# Altium PCB Thermistor_Expansion_Board.PcbDoc
Units mil, origin at the board's own origin, x right, y up, seen from the top; angles counter-clockwise.
Board outline 6000 x 4000 mil, 2 copper layers (Top Layer, Bottom Layer); 60 components, 69 nets, 450 pads, 0 vias.
Unrouted connection lines stored in the file: 381.
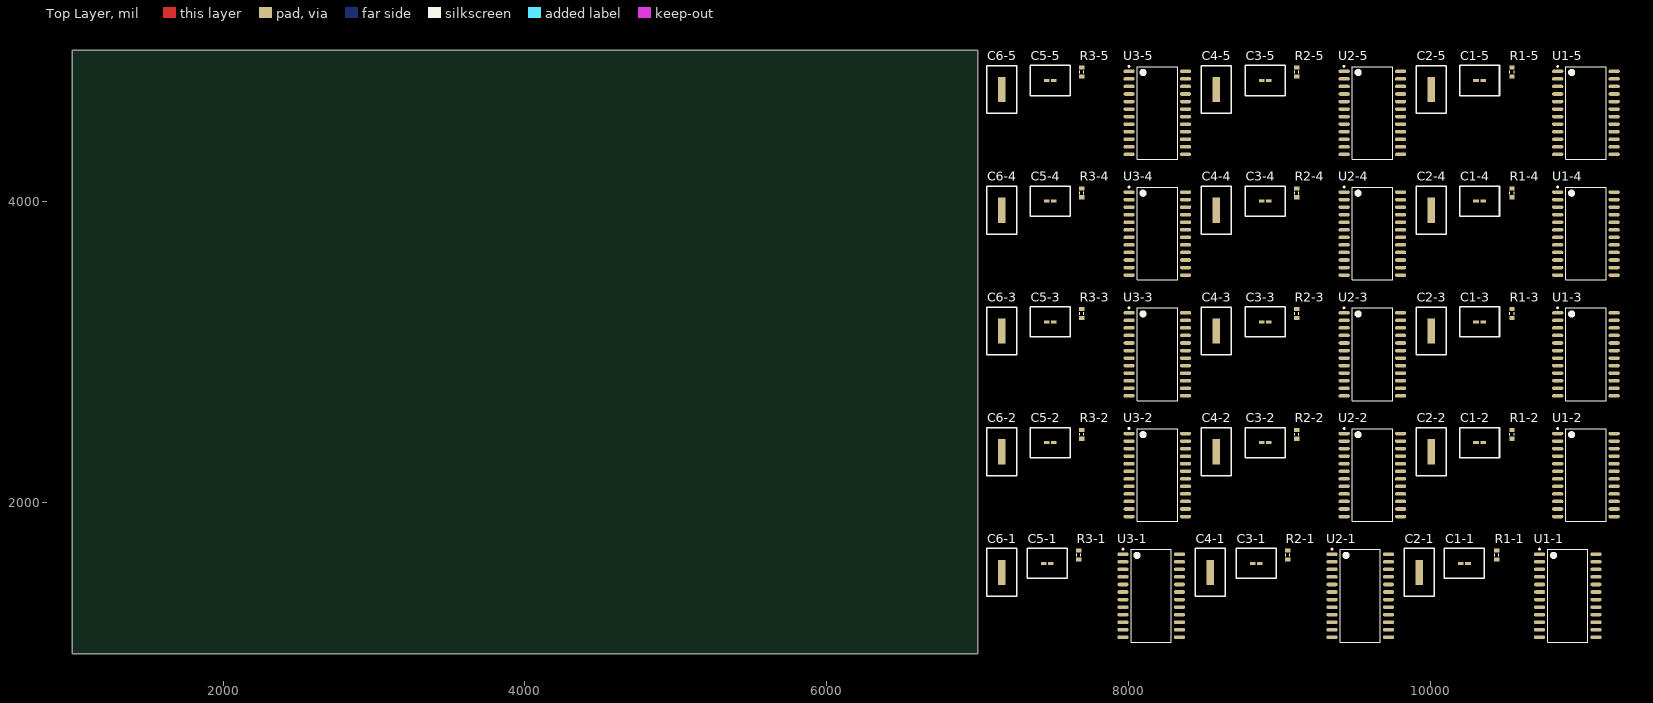
[diagram p0: Top Layer view]
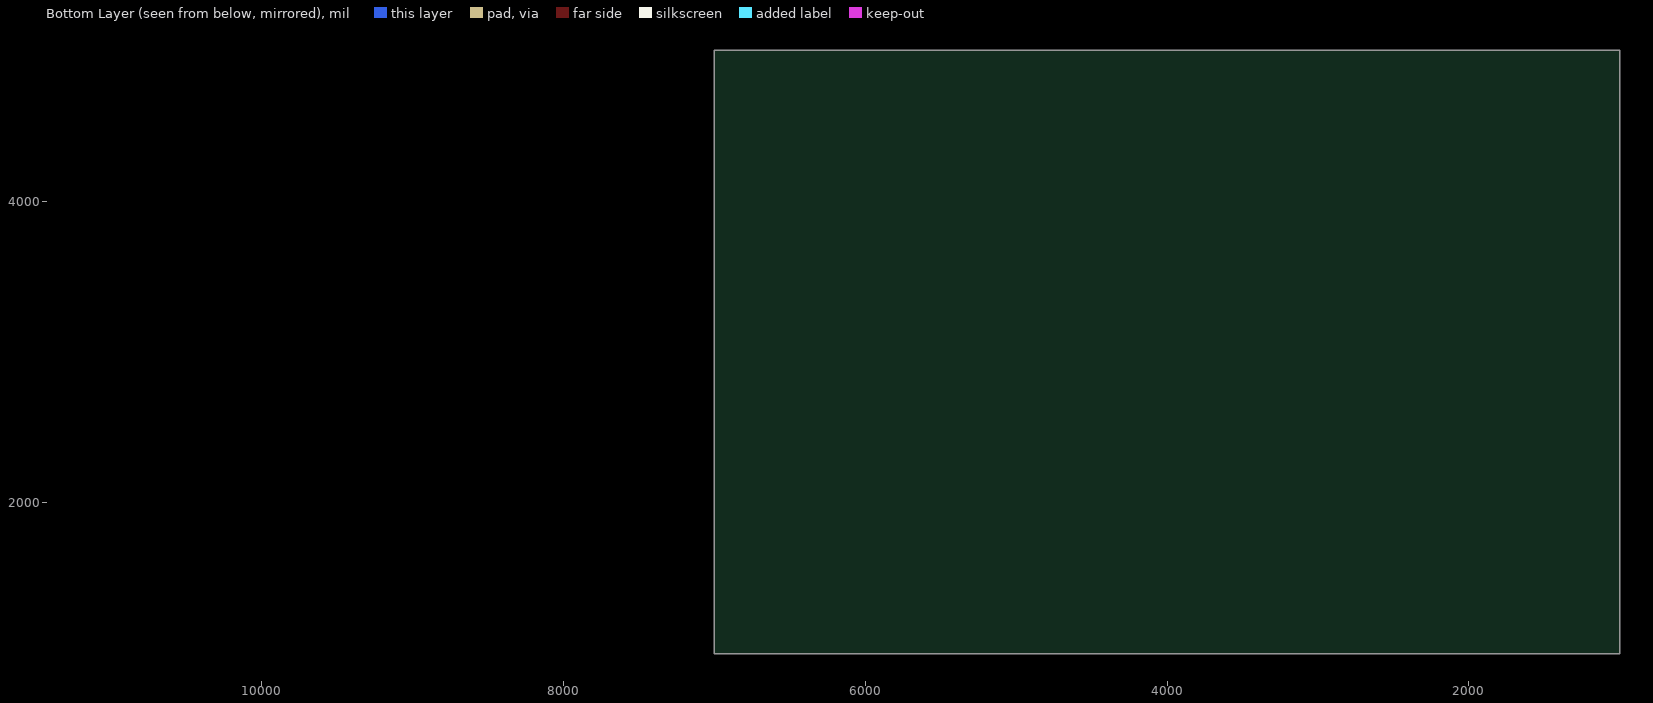
[diagram p1: Bottom Layer view, seen from below]

## Layer stack, top to bottom
Top Solder: solder mask 0.4, Solder Resist, Dk 3.5
Top Layer: signal copper 1.4
Dielectric 1: dielectric 12.6, FR-4, Dk 4.8
Bottom Layer: signal copper 1.4
Bottom Solder: solder mask 0.4, Solder Resist, Dk 3.5

## Board outline
1000,1000 7000,1000 7000,5000 1000,5000

## Design rules (kind name [scope] priority, off if disabled: settings)
Clearance [All] p1: gap=10 ignorepadtopadclearanceinfootprint=FALSE except(0: Arc-Hole Track-Hole SMDPad-Hole THPad-Hole Via-Hole Fill-Hole Poly-Hole Region-Hole Text-Hole)
PolygonConnect [All] p1: connectstyle=Relief reliefconductorwidth=10 reliefentries=4 polygonreliefangle="90 Angle" airgapwidth=10
RoomDefinition 50_Pin_Connector5 [InComponentClass('50_Pin_Connector5')] p1: confinementstyle=ConfineIn formatcopy=TRUE lockcomponents=FALSE outline 1135,2390 3135,2390 3135,3390 1135,3390
RoomDefinition 50_Pin_Connector4 [InComponentClass('50_Pin_Connector4')] p2: confinementstyle=ConfineIn formatcopy=TRUE lockcomponents=FALSE outline 1045,1085 3045,1085 3045,2085 1045,2085
RoomDefinition 50_Pin_Connector3 [InComponentClass('50_Pin_Connector3')] p3: confinementstyle=ConfineIn formatcopy=TRUE lockcomponents=FALSE outline 770,5550 2770,5550 2770,6550 770,6550
RoomDefinition 50_Pin_Connector1 [InComponentClass('50_Pin_Connector1')] p4: confinementstyle=ConfineIn formatcopy=TRUE lockcomponents=FALSE outline 2645,6685 4645,6685 4645,7685 2645,7685
RoomDefinition 3_MUX5 [InComponentClass('3_MUX5')] p5: confinementstyle=ConfineIn formatcopy=TRUE lockcomponents=FALSE outline 7045,4260 11270,4260 11270,5010 7045,5010
RoomDefinition 3_MUX4 [InComponentClass('3_MUX4')] p6: confinementstyle=ConfineIn formatcopy=TRUE lockcomponents=FALSE outline 7045,3460 11270,3460 11270,4210 7045,4210
RoomDefinition 3_MUX3 [InComponentClass('3_MUX3')] p7: confinementstyle=ConfineIn formatcopy=TRUE lockcomponents=FALSE outline 7045,2660 11270,2660 11270,3410 7045,3410
RoomDefinition 3_MUX2 [InComponentClass('3_MUX2')] p8: confinementstyle=ConfineIn formatcopy=TRUE lockcomponents=FALSE outline 7045,1860 11270,1860 11270,2610 7045,2610
RoomDefinition 3_MUX1 [InComponentClass('3_MUX1')] p9: confinementstyle=ConfineIn formatcopy=TRUE lockcomponents=FALSE outline 7045,1060 11150,1060 11150,1810 7045,1810
RoomDefinition 50_Pin_Connector2 [InComponentClass('50_Pin_Connector2')] p10: confinementstyle=ConfineIn formatcopy=TRUE lockcomponents=FALSE outline 980,3905 2980,3905 2980,4905 980,4905
RoutingVias [All] p1: holewidth=28 width=50 viastyle="Through Hole" minholewidth=28 minwidth=50 maxholewidth=28 maxwidth=50
SolderMaskExpansion [All] p1: expansion=4
Width [All] p1: maxlimit=10 minlimit=10 preferedwidth=10
30 further rules are at their usual default settings.

## Classes and differential pairs
channel class CD74HC4067_MUX: 3_MUX1 3_MUX2 3_MUX3 3_MUX4 3_MUX5
channel class AHK50H-ND_THERM_CONNECTOR: 50_Pin_Connector1 50_Pin_Connector2 50_Pin_Connector3 50_Pin_Connector4 50_Pin_Connector5
component class 50_Pin_Connector5: P2-5
component class 50_Pin_Connector4: P2-4
component class 50_Pin_Connector3: P2-3
component class 50_Pin_Connector2: P2-2
component class 50_Pin_Connector1: P2-1
component class 3_MUX5: C1-5 C2-5 C3-5 C4-5 C5-5 C6-5 R1-5 R2-5 R3-5 U1-5 U2-5 U3-5
component class 3_MUX4: C1-4 C2-4 C3-4 C4-4 C5-4 C6-4 R1-4 R2-4 R3-4 U1-4 U2-4 U3-4
component class 3_MUX3: C1-3 C2-3 C3-3 C4-3 C5-3 C6-3 R1-3 R2-3 R3-3 U1-3 U2-3 U3-3
component class 3_MUX2: C1-2 C2-2 C3-2 C4-2 C5-2 C6-2 R1-2 R2-2 R3-2 U1-2 U2-2 U3-2
component class 3_MUX1: C1-1 C2-1 C3-1 C4-1 C5-1 C6-1 R1-1 R2-1 R3-1 U1-1 U2-1 U3-1

## Components (designator, comment, footprint, x,y, rotation, side; value= is the part's Value field where it differs from the comment)
C1-1 "0.1uF Cap" "Capacitor - duplicate" 10225,1600 r0 top (schematic designator C1)
C1-2 "0.1uF Cap" "Capacitor - duplicate" 10325,2400 r0 top (schematic designator C1)
C1-3 "0.1uF Cap" "Capacitor - duplicate" 10325,3200 r0 top (schematic designator C1)
C1-4 "0.1uF Cap" "Capacitor - duplicate" 10325,4000 r0 top (schematic designator C1)
C1-5 "0.1uF Cap" "Capacitor - duplicate" 10325,4800 r0 top (schematic designator C1)
C2-1 "1uF Samsung Cap" Capacitor 9925,1540 r90 top (schematic designator C2)
C2-2 "1uF Samsung Cap" Capacitor 10005,2340 r90 top (schematic designator C2)
C2-3 "1uF Samsung Cap" Capacitor 10005,3140 r90 top (schematic designator C2)
C2-4 "1uF Samsung Cap" Capacitor 10005,3940 r90 top (schematic designator C2)
C2-5 "1uF Samsung Cap" Capacitor 10005,4740 r90 top (schematic designator C2)
C3-1 "0.1uF Cap" "Capacitor - duplicate" 8845,1600 r0 top (schematic designator C3)
C3-2 "0.1uF Cap" "Capacitor - duplicate" 8905,2400 r0 top (schematic designator C3)
C3-3 "0.1uF Cap" "Capacitor - duplicate" 8905,3200 r0 top (schematic designator C3)
C3-4 "0.1uF Cap" "Capacitor - duplicate" 8905,4000 r0 top (schematic designator C3)
C3-5 "0.1uF Cap" "Capacitor - duplicate" 8905,4800 r0 top (schematic designator C3)
C4-1 "1uF Samsung Cap" Capacitor 8540,1540 r90 top (schematic designator C4)
C4-2 "1uF Samsung Cap" Capacitor 8580,2340 r90 top (schematic designator C4)
C4-3 "1uF Samsung Cap" Capacitor 8580,3140 r90 top (schematic designator C4)
C4-4 "1uF Samsung Cap" Capacitor 8580,3940 r90 top (schematic designator C4)
C4-5 "1uF Samsung Cap" Capacitor 8580,4740 r90 top (schematic designator C4)
C5-1 "0.1uF Cap" "Capacitor - duplicate" 7460,1600 r0 top (schematic designator C5)
C5-2 "0.1uF Cap" "Capacitor - duplicate" 7480,2400 r0 top (schematic designator C5)
C5-3 "0.1uF Cap" "Capacitor - duplicate" 7480,3200 r0 top (schematic designator C5)
C5-4 "0.1uF Cap" "Capacitor - duplicate" 7480,4000 r0 top (schematic designator C5)
C5-5 "0.1uF Cap" "Capacitor - duplicate" 7480,4800 r0 top (schematic designator C5)
C6-1 "1uF Samsung Cap" Capacitor 7160,1540 r90 top (schematic designator C6)
C6-2 "1uF Samsung Cap" Capacitor 7160,2340 r90 top (schematic designator C6)
C6-3 "1uF Samsung Cap" Capacitor 7160,3140 r90 top (schematic designator C6)
C6-4 "1uF Samsung Cap" Capacitor 7160,3940 r90 top (schematic designator C6)
C6-5 "1uF Samsung Cap" Capacitor 7160,4740 r90 top (schematic designator C6)
R1-1 "Res3" J1-0603 10440,1655 r90 top value=3.3K (schematic designator R1)
R1-2 "Res3" J1-0603 10540,2455 r90 top value=3.3K (schematic designator R1)
R1-3 "Res3" J1-0603 10540,3255 r90 top value=3.3K (schematic designator R1)
R1-4 "Res3" J1-0603 10540,4055 r90 top value=3.3K (schematic designator R1)
R1-5 "Res3" J1-0603 10540,4855 r90 top value=3.3K (schematic designator R1)
R2-1 "Res3" J1-0603 9055,1655 r90 top value=3.3K (schematic designator R2)
R2-2 "Res3" J1-0603 9115,2455 r90 top value=3.3K (schematic designator R2)
R2-3 "Res3" J1-0603 9115,3255 r90 top value=3.3K (schematic designator R2)
R2-4 "Res3" J1-0603 9115,4055 r90 top value=3.3K (schematic designator R2)
R2-5 "Res3" J1-0603 9115,4855 r90 top value=3.3K (schematic designator R2)
R3-1 "Res3" J1-0603 7670,1655 r90 top value=3.3K (schematic designator R3)
R3-2 "Res3" J1-0603 7690,2455 r90 top value=3.3K (schematic designator R3)
R3-3 "Res3" J1-0603 7690,3255 r90 top value=3.3K (schematic designator R3)
R3-4 "Res3" J1-0603 7690,4055 r90 top value=3.3K (schematic designator R3)
R3-5 "Res3" J1-0603 7690,4855 r90 top value=3.3K (schematic designator R3)
U1-1 "CD74HC4067SM96" SOIC-24_MUX 10910,1385 r0 top (schematic designator U1)
U1-2 "CD74HC4067SM96" SOIC-24_MUX 11030,2185 r0 top (schematic designator U1)
U1-3 "CD74HC4067SM96" SOIC-24_MUX 11030,2985 r0 top (schematic designator U1)
U1-4 "CD74HC4067SM96" SOIC-24_MUX 11030,3785 r0 top (schematic designator U1)
U1-5 "CD74HC4067SM96" SOIC-24_MUX 11030,4585 r0 top (schematic designator U1)
U2-1 "CD74HC4067SM96" SOIC-24_MUX 9535,1385 r0 top (schematic designator U2)
U2-2 "CD74HC4067SM96" SOIC-24_MUX 9615,2185 r0 top (schematic designator U2)
U2-3 "CD74HC4067SM96" SOIC-24_MUX 9615,2985 r0 top (schematic designator U2)
U2-4 "CD74HC4067SM96" SOIC-24_MUX 9615,3785 r0 top (schematic designator U2)
U2-5 "CD74HC4067SM96" SOIC-24_MUX 9615,4585 r0 top (schematic designator U2)
U3-1 "CD74HC4067SM96" SOIC-24_MUX 8150,1385 r0 top (schematic designator U3)
U3-2 "CD74HC4067SM96" SOIC-24_MUX 8190,2185 r0 top (schematic designator U3)
U3-3 "CD74HC4067SM96" SOIC-24_MUX 8190,2985 r0 top (schematic designator U3)
U3-4 "CD74HC4067SM96" SOIC-24_MUX 8190,3785 r0 top (schematic designator U3)
U3-5 "CD74HC4067SM96" SOIC-24_MUX 8190,4585 r0 top (schematic designator U3)

## Footprints (in the part's own frame and the unit in brackets; to place one, negate y for a bottom-side part, rotate by r counter-clockwise, add the part's x,y. Pads: shape width x height; smd on the part's side, far side on the other; paste and mask are expansions set on the pad)
Capacitor [mm] "0603 Kemet Ceramic Capacitor"
  rect 2.54x1.27 smd: 1(-0.85,0) 2(0.85,0)
  silkscreen extent -4.02,-2.54 4.03,2.54
"Capacitor - duplicate" [mm]
  rect 0.95x0.5 smd: 1(-0.6,0) 2(0.6,0)
  silkscreen extent -3.36,-2.54 3.37,2.54
J1-0603 [mm] "Chip Resistor, Body 1.6x0.8mm, IPC High Density"
  rect 0.7x0.9 smd: 1(-0.75,0) 2(0.75,0)
  silkscreen extent -0.2,-0.35 0.2,0.35, body extent -0.85,-0.48 0.85,0.48, height 0.9
SOIC-24_MUX [mm] "SOIC, 24-Leads, Body 15.40x7.50mm, Pitch 1.27mm, IPC Medium Density"
  oval 1.9x0.6 smd: 1(-4.75,6.985) 2(-4.75,5.715) 3(-4.75,4.445) 4(-4.75,3.175) 5(-4.75,1.905) 6(-4.75,0.635) 7(-4.75,-0.635) 8(-4.75,-1.905) 9(-4.75,-3.175) 10(-4.75,-4.445) 11(-4.75,-5.715) 12(-4.75,-6.985) 13(4.75,-6.985) 14(4.75,-5.715) 15(4.75,-4.445) 16(4.75,-3.175) 17(4.75,-1.905) 18(4.75,-0.635) 19(4.75,0.635) 20(4.75,1.905) 21(4.75,3.175) 22(4.75,4.445) 23(4.75,5.715) 24(4.75,6.985)
  silkscreen extent -4.87,-7.8 3.4,7.96, body extent -5.15,-7.8 5.15,7.8, height 2.65

## Part data
C1-1 C1-2 C1-3 C1-4 C1-5 C3-1 C3-2 C3-3 C3-4 C3-5 C5-1 C5-2 C5-3 C5-4 C5-5: "C0603C101K8GAC7867 Kemet Capacitor", Supplier Part Number 1=399-14477-1-ND, Supplier 1=Digi-Key
C2-1 C2-2 C2-3 C2-4 C2-5 C4-1 C4-2 C4-3 C4-4 C4-5 C6-1 C6-2 C6-3 C6-4 C6-5: Supplier Part Number 1=1276-1946-1-ND, Supplier 1=Digi-Key
R1-1 R1-2 R1-3 R1-4 R1-5 R2-1 R2-2 R2-3 R2-4 R2-5 R3-1 R3-2 R3-3 R3-4 R3-5: "Resistor", LatestRevisionDate=29-May-2009, LatestRevisionNote="IPC-7351 Footprint Added.", PackageDescription="Chip Resistor", PackageReference=J1-0603, Published=8-Jun-2000, Publisher="Altium Limited"
U1-1 U1-2 U1-3 U1-4 U1-5 U2-1 U2-2 U2-3 U2-4 U2-5 U3-1 U3-2 U3-3 U3-4 U3-5: Supplier Part Number 1=05B6161, Supplier 1=Newark

## Nets (pads, with @x,y where several pads share a name; then routed paths per layer and width w, separated by ;. In a path a pad name is that pad's centre, name@x,y a point inside that pad or via, vN(x,y) a via of type N, cw(c..) or ccw(c..) an arc to the next point about the centre after c; other vN are vias at no path point)
5V: C1-1.1 C1-2.1 C1-3.1 C1-4.1 C1-5.1 C2-1.1 C2-2.1 C2-3.1 C2-4.1 C2-5.1 C3-1.1 C3-2.1 C3-3.1 C3-4.1 C3-5.1 C4-1.1 C4-2.1 C4-3.1 C4-4.1 C4-5.1 C5-1.1 C5-2.1 C5-3.1 C5-4.1 C5-5.1 C6-1.1 C6-2.1 C6-3.1 C6-4.1 C6-5.1 R1-1.1 R1-2.1 R1-3.1 R1-4.1 R1-5.1 R2-1.1 R2-2.1 R2-3.1 R2-4.1 R2-5.1 R3-1.1 R3-2.1 R3-3.1 R3-4.1 R3-5.1 U1-1.24 U1-2.24 U1-3.24 U1-4.24 U1-5.24 U2-1.24 U2-2.24 U2-3.24 U2-4.24 U2-5.24 U3-1.24 U3-2.24 U3-3.24 U3-4.24 U3-5.24
NetR1-1_2: R1-1.2 U1-1.1
NetR1-2_2: R1-2.2 U1-2.1
NetR1-3_2: R1-3.2 U1-3.1
NetR1-4_2: R1-4.2 U1-4.1
NetR1-5_2: R1-5.2 U1-5.1
NetR2-1_2: R2-1.2 U2-1.1
NetR2-2_2: R2-2.2 U2-2.1
NetR2-3_2: R2-3.2 U2-3.1
NetR2-4_2: R2-4.2 U2-4.1
NetR2-5_2: R2-5.2 U2-5.1
NetR3-1_2: R3-1.2 U3-1.1
NetR3-2_2: R3-2.2 U3-2.1
NetR3-3_2: R3-3.2 U3-3.1
NetR3-4_2: R3-4.2 U3-4.1
NetR3-5_2: R3-5.2 U3-5.1
NetU1-1_13: U1-1.13 U1-2.13 U1-3.13 U1-4.13 U1-5.13
S0-1: U1-1.10 U1-2.10 U1-3.10 U1-4.10 U1-5.10 U2-1.10 U2-2.10 U2-3.10 U2-4.10 U2-5.10 U3-1.10 U3-2.10 U3-3.10 U3-4.10 U3-5.10
S1-1: U1-1.11 U1-2.11 U1-3.11 U1-4.11 U1-5.11 U2-1.11 U2-2.11 U2-3.11 U2-4.11 U2-5.11 U3-1.11 U3-2.11 U3-3.11 U3-4.11 U3-5.11
S2-1: C1-1.2 C1-2.2 C1-3.2 C1-4.2 C1-5.2 C2-1.2 C2-2.2 C2-3.2 C2-4.2 C2-5.2 C3-1.2 C3-2.2 C3-3.2 C3-4.2 C3-5.2 C4-1.2 C4-2.2 C4-3.2 C4-4.2 C4-5.2 C5-1.2 C5-2.2 C5-3.2 C5-4.2 C5-5.2 C6-1.2 C6-2.2 C6-3.2 C6-4.2 C6-5.2 U1-1.12 U1-1.15 U1-2.12 U1-2.15 U1-3.12 U1-3.15 U1-4.12 U1-4.15 U1-5.12 U1-5.15 U2-1.12 U2-1.14 U2-1.15 U2-2.12 U2-2.14 U2-2.15 U2-3.12 U2-3.14 U2-3.15 U2-4.12 U2-4.14 U2-4.15 U2-5.12 U2-5.14 U2-5.15 U3-1.12 U3-1.14 U3-1.15 U3-2.12 U3-2.14 U3-2.15 U3-3.12 U3-3.14 U3-3.15 U3-4.12 U3-4.14 U3-4.15 U3-5.12 U3-5.14 U3-5.15
S3-1: U1-1.14 U1-2.14 U1-3.14 U1-4.14 U1-5.14 U2-1.13 U2-2.13 U2-3.13 U2-4.13 U2-5.13 U3-1.13 U3-2.13 U3-3.13 U3-4.13 U3-5.13
TS_IN1-1: U1-1.9 U1-2.9 U1-3.9 U1-4.9 U1-5.9
TS_IN2-1: U1-1.8 U1-2.8 U1-3.8 U1-4.8 U1-5.8
TS_IN3-1: U1-1.7 U1-2.7 U1-3.7 U1-4.7 U1-5.7
TS_IN4-1: U1-1.6 U1-2.6 U1-3.6 U1-4.6 U1-5.6
TS_IN5-1: U1-1.5 U1-2.5 U1-3.5 U1-4.5 U1-5.5
TS_IN6-1: U1-1.4 U1-2.4 U1-3.4 U1-4.4 U1-5.4
TS_IN7-1: U1-1.3 U1-2.3 U1-3.3 U1-4.3 U1-5.3
TS_IN8-1: U1-1.2 U1-2.2 U1-3.2 U1-4.2 U1-5.2
TS_IN9-1: U1-1.16 U1-2.16 U1-3.16 U1-4.16 U1-5.16
TS_IN10-1: U1-1.17 U1-2.17 U1-3.17 U1-4.17 U1-5.17
TS_IN11-1: U1-1.18 U1-2.18 U1-3.18 U1-4.18 U1-5.18
TS_IN12-1: U1-1.19 U1-2.19 U1-3.19 U1-4.19 U1-5.19
TS_IN13-1: U1-1.20 U1-2.20 U1-3.20 U1-4.20 U1-5.20
TS_IN14-1: U1-1.21 U1-2.21 U1-3.21 U1-4.21 U1-5.21
TS_IN15-1: U1-1.22 U1-2.22 U1-3.22 U1-4.22 U1-5.22
TS_IN16-1: U1-1.23 U1-2.23 U1-3.23 U1-4.23 U1-5.23
TS_IN17-1: U2-1.9 U2-2.9 U2-3.9 U2-4.9 U2-5.9
TS_IN18-1: U2-1.8 U2-2.8 U2-3.8 U2-4.8 U2-5.8
TS_IN19-1: U2-1.7 U2-2.7 U2-3.7 U2-4.7 U2-5.7
TS_IN20-1: U2-1.6 U2-2.6 U2-3.6 U2-4.6 U2-5.6
TS_IN21-1: U2-1.5 U2-2.5 U2-3.5 U2-4.5 U2-5.5
TS_IN22-1: U2-1.4 U2-2.4 U2-3.4 U2-4.4 U2-5.4
TS_IN23-1: U2-1.3 U2-2.3 U2-3.3 U2-4.3 U2-5.3
TS_IN24-1: U2-1.2 U2-2.2 U2-3.2 U2-4.2 U2-5.2
TS_IN25-1: U2-1.16 U2-2.16 U2-3.16 U2-4.16 U2-5.16
TS_IN26-1: U2-1.17 U2-2.17 U2-3.17 U2-4.17 U2-5.17
TS_IN27-1: U2-1.18 U2-2.18 U2-3.18 U2-4.18 U2-5.18
TS_IN28-1: U2-1.19 U2-2.19 U2-3.19 U2-4.19 U2-5.19
TS_IN29-1: U2-1.20 U2-2.20 U2-3.20 U2-4.20 U2-5.20
TS_IN30-1: U2-1.21 U2-2.21 U2-3.21 U2-4.21 U2-5.21
TS_IN31-1: U2-1.22 U2-2.22 U2-3.22 U2-4.22 U2-5.22
TS_IN32-1: U2-1.23 U2-2.23 U2-3.23 U2-4.23 U2-5.23
TS_IN33-1: U3-1.9 U3-2.9 U3-3.9 U3-4.9 U3-5.9
TS_IN34-1: U3-1.8 U3-2.8 U3-3.8 U3-4.8 U3-5.8
TS_IN35-1: U3-1.7 U3-2.7 U3-3.7 U3-4.7 U3-5.7
TS_IN36-1: U3-1.6 U3-2.6 U3-3.6 U3-4.6 U3-5.6
TS_IN37-1: U3-1.5 U3-2.5 U3-3.5 U3-4.5 U3-5.5
TS_IN38-1: U3-1.4 U3-2.4 U3-3.4 U3-4.4 U3-5.4
TS_IN39-1: U3-1.3 U3-2.3 U3-3.3 U3-4.3 U3-5.3
TS_IN40-1: U3-1.2 U3-2.2 U3-3.2 U3-4.2 U3-5.2
TS_IN41-1: U3-1.16 U3-2.16 U3-3.16 U3-4.16 U3-5.16
TS_IN42-1: U3-1.17 U3-2.17 U3-3.17 U3-4.17 U3-5.17
TS_IN43-1: U3-1.18 U3-2.18 U3-3.18 U3-4.18 U3-5.18
TS_IN44-1: U3-1.19 U3-2.19 U3-3.19 U3-4.19 U3-5.19
TS_IN45-1: U3-1.20 U3-2.20 U3-3.20 U3-4.20 U3-5.20
TS_IN46-1: U3-1.21 U3-2.21 U3-3.21 U3-4.21 U3-5.21
TS_IN47-1: U3-1.22 U3-2.22 U3-3.22 U3-4.22 U3-5.22
TS_IN48-1: U3-1.23 U3-2.23 U3-3.23 U3-4.23 U3-5.23